# EAGLE board mic_sensor_arduino_panelized (EAGLE 9.6.2)
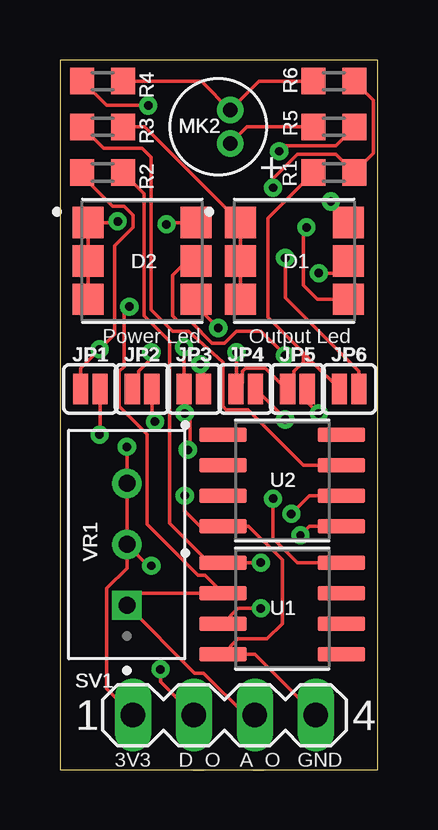
[diagram p0: board, top side]
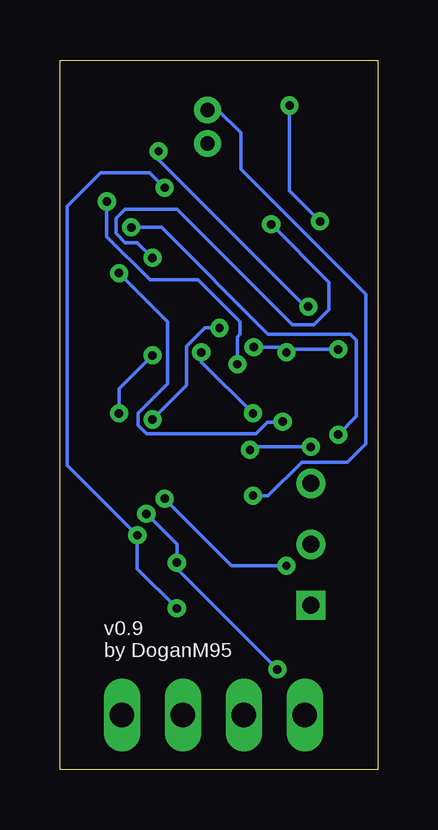
[diagram p1: board, bottom side, seen from below]

Size 13.26 x 29.58 mm. Coordinates in mm from the lower left corner, seen from the top.
Outline: 0,0 13.26,0 13.26,29.58 0,29.58 0,0
Copper layers (1*16): Top 0.035mm / dielectric 1.5mm / Bottom 0.035mm
Design rules "default *": minimum track width 6mil, minimum drill 0.35mm, track to track 6mil, track to pad 6mil, pad to pad 6mil, via to via 6mil, smd to smd 6mil, copper to edge 40mil, drill to drill 6mil, minimum pad ring 10mil, minimum via ring 8mil, stop-mask expansion 4mil, vias tented up to drill 20mil, thermal gap 10mil

## Footprints (pad centres in the part's own frame; a part is rotated, then mirrored left to right if it is on the bottom)
LED_LTST-G563ZEGBW = smd 1.3 x 1.3: 1 -2.25,1.6; 2 -2.25,0; 3 -2.25,-1.6; 4 2.25,-1.6; 5 2.25,0; 6 2.25,1.6
SMT-JUMPER_2_NO_SILK = smd 0.635 x 1.27: 1 -0.406,0; 2 0.406,0
MIC_CMC-4015-40P = drill 0.6: M 0.5,0.7; P 0.5,-0.7
R0603 = smd 1 x 1.1: 1 -0.85,0; 2 0.85,0
MA04-1 = drill 1.016 long: 1 -3.81,0; 2 -1.27,0; 3 1.27,0; 4 3.81,0
SOIC127P599X175-8N = smd 1.97 x 0.6: 1 -2.47,1.905; 2 -2.47,0.635; 3 -2.47,-0.635; 4 -2.47,-1.905; 5 2.47,-1.905; 6 2.47,-0.635; 7 2.47,0.635; 8 2.47,1.905
TRIM_3296W-1-103RLF = drill 0.71 square: 1 -2.54,0 | drill 0.71: 2 0,0; 3 2.54,0

## Placement (x,y rotation side)
D1  OUT_LTST-G563ZEGBW  [LED_LTST-G563ZEGBW]  9.78,21.21 0 top
D2  PWR_LTST-G563ZEGBW  [LED_LTST-G563ZEGBW]  3.43,21.21 0 top
JP1  RED  [SMT-JUMPER_2_NO_SILK]  1.27,15.88 0 top
JP2  GREEN  [SMT-JUMPER_2_NO_SILK]  3.43,15.88 0 top
JP3  BLUE  [SMT-JUMPER_2_NO_SILK]  5.59,15.88 0 top
JP4  RED  [SMT-JUMPER_2_NO_SILK]  7.75,15.88 0 top
JP5  Green  [SMT-JUMPER_2_NO_SILK]  9.91,15.88 0 top
JP6  Blue  [SMT-JUMPER_2_NO_SILK]  12.06,15.88 0 top
MK2  CMC-4015-40P  [MIC_CMC-4015-40P]  6.6,26.8 0 top
R1  100k  [R0603]  11.43,24.89 180 top
R2  10k  [R0603]  1.78,24.89 180 top
R3  10k  [R0603]  1.78,26.8 0 top
R4  1k  [R0603]  1.78,28.7 180 top
R5  150R  [R0603]  11.43,26.8 0 top
R6  100k  [R0603]  11.43,28.7 0 top
SV1  [MA04-1]  6.86,2.29 0 top
U1  LM393DR  [SOIC127P599X175-8N]  9.27,6.73 0 top
U2  LM393DR  [SOIC127P599X175-8N]  9.27,12.06 0 top
VR1  3296W-1-103RLF  [TRIM_3296W-1-103RLF]  2.79,9.4 90 top

## Library data of the parts
D1 D2 = LTST-G563ZEGBW; AVAILABILITY: Not in stock; CHECK_PRICES: https://www.snapeda.com/parts/LTST-G563ZEGBW/Lite-On/view-part/?ref=eda; DESCRIPTION: LED; SMD; 5050, PLCC6; RGB; 5x5x1.6mm; 120°; 20mA; Lens: transparent; MF: Lite-On; MP: LTST-G563ZEGBW; PACKAGE: PLCC-6 Lite-On; PRICE: None; SNAPEDA_LINK: https://www.snapeda.com/parts/LTST-G563ZEGBW/Lite-On/view-part/?ref=snap
JP1-JP6 = SparkFun-Jumpers
MK2 = CMC-4015-40P; AVAILABILITY: In Stock; CHECK_PRICES: https://www.snapeda.com/parts/CMC-4015-40P/CUI+Devices/view-part/?ref=eda; CUI_PURCHASE_URL: https://www.cuidevices.com/product/audio/microphones/electret-condenser-microphones/cmc-4015-40p?utm_source=snapeda.com&utm_medium=referral&utm_campaign=snapedaBOM; DESCRIPTION: 4.0 mm, Omnidirectional, PCB Mount, 2.0 Vdc, Electret Condenser Microphone; MF: CUI Devices; MP: CMC-4015-40P; PACKAGE: None; PRICE: None; PURCHASE-URL: https://www.snapeda.com/api/url_track_click_mouser/?unipart_id=1814008&manufacturer=CUI Devices&part_name=CMC-4015-40P&search_term=cmc-4015-40p; SNAPEDA_LINK: https://www.snapeda.com/parts/CMC-4015-40P/CUI+Devices/view-part/?ref=snap
R1-R6 = resistor
SV1 = con-lstb; OC_FARNELL: unknown; OC_NEWARK: unknown
U1 U2 = LM393DR; AVAILABILITY: In Stock; CHECK_PRICES: https://www.snapeda.com/parts/LM393DR/Texas+Instruments/view-part/?ref=eda; DESCRIPTION: Dual differential comparator, commercial grade; MF: Texas Instruments; MP: LM393DR; PACKAGE: SOIC-8 Texas Instruments; PRICE: None; PURCHASE-URL: https://www.snapeda.com/api/url_track_click_mouser/?unipart_id=6437&manufacturer=Texas Instruments&part_name=LM393DR&search_term=lm393dr; SNAPEDA_LINK: https://www.snapeda.com/parts/LM393DR/Texas+Instruments/view-part/?ref=snap
VR1 = 3296W-1-103RLF; AVAILABILITY: In Stock; CHECK_PRICES: https://www.snapeda.com/parts/3296W-1-103RLF/Bourns/view-part/?ref=eda; DESCRIPTION: Trimmer, Cermet, Rest 10 Kilohms, PCB, 25 Turns, Pwr-Rtg 0.5W | Bourns 3296W-1-103RLF; MF: Bourns; MP: 3296W-1-103RLF; PACKAGE: NON STANDARD-3 Bourns; PRICE: None; PURCHASE-URL: https://www.snapeda.com/api/url_track_click_mouser/?unipart_id=480309&manufacturer=Bourns&part_name=3296W-1-103RLF&search_term=None; SNAPEDA_LINK: https://www.snapeda.com/parts/3296W-1-103RLF/Bourns/view-part/?ref=snap

## Nets
2IN+: R1.1 R6.2 U1.3 U2.5
2OUT: R3.1 U2.7
3V3: JP1.1 JP2.1 JP3.1 JP4.1 JP5.1 JP6.1 R1.2 R2.2 SV1.1 U1.8 VR1.2 VR1.3
A_OUT: R5.2 SV1.3 U1.2 VR1.1
D_OUT: R2.1 SV1.2 U1.1 U2.6
GND: MK2.M R4.1 R6.1 SV1.4 U1.4 U2.4
N$1: D1.4 JP1.2
N$2: D1.5 JP2.2
N$5: D1.6 JP3.2
N$6: D2.4 JP4.2
N$7: D2.5 JP5.2
N$8: D2.6 JP6.2
O_L_GND: D1.1 D1.2 D1.3 R3.2
OUT: MK2.P R5.1
P_L_GND: D2.1 D2.2 D2.3 R4.2
VCC: U2.8

## Tracks (layer width: path | path; a pad name or v marks a point on that pad's centre or on a via)
2IN+  (via drill 0.35)
  Top 0.152: U1.3 7.44,6.73 v8.38,6.73 | v10.03,9.78 10.41,10.16 U2.5 | R6.2 13.08,27.9 13.08,25.69 R1.1 11.52,25.65 9.91,25.65 8.89,24.64 v8.89,24.26
  Bottom 0.152: v8.38,6.73 10.03,8.38 v10.03,9.78 12.95,12.7 12.95,23.5 11.56,24.89 9.53,24.89 v8.89,24.26
2OUT
  Top 0.152: R3.1 1.82,25.91 3.43,25.91 3.81,25.53 3.81,19.18 4.7,18.29 5.37,18.29 6.79,16.99 6.79,15.14 6.93,15.01 7.85,15.01 10.16,12.7 U2.7
3V3  (via drill 0.35)
  Top 0.152: VR1.2 VR1.3 v2.79,13.46 | VR1.2 2.79,8.4 1.96,7.56 1.96,3.38 SV1.1 | R1.2 8.68,22.99 8.68,18.86 10.08,17.45 10.16,17.37 | 10.16,17.37 10.58,16.95 | 10.58,16.95 JP6.1 | 10.58,16.95 10.16,16.95 | 10.16,16.95 10.12,16.95 9.77,16.61 9.77,16.14 JP5.1 9.43,15.88 8.57,16.74 7.74,16.74 7.61,16.61 7.61,16.14 JP4.1 7.37,15.9 v7.37,17.4 | JP1.1 0.86,16.74 v1.65,17.53 2.29,18.16 2.29,21.84 3.05,22.61 3.05,23.11 2.67,23.5 2.2,23.5 0.93,24.77 R2.2 | JP2.1 3.29,16.14 3.29,16.61 3.81,17.12 v3.81,17.4 | v5.18,17.62 5.21,17.64 5.21,17.65 v5.18,17.63 JP3.1 5.18,14.88 v5.21,14.86 5.44,14.63 5.44,13.44 v5.33,13.34 | U1.8 9.91,8.64 8.89,9.65 v8.89,11.3 | v3.81,8.51 3.68,8.51 VR1.2 | 10.16,16.95 10.16,17.37
  Bottom 0.152: v1.65,17.53 3.68,17.53 v3.81,17.4 4.03,17.62 v5.18,17.62 | v5.21,14.86 7.37,17.02 v7.37,17.4 | v8.89,11.3 6.1,8.51 v3.81,8.51 | v2.79,13.46 5.21,13.46 v5.33,13.34
A_OUT  (via drill 0.35)
  Top 0.152: SV1.3 7.75,2.29 6,4.04 5.61,4.04 VR1.1 3.3,7.37 U1.2 6.06,8.11 5.76,8.11 3.63,10.24 3.63,13.99 2.48,15.14 2.48,16.61 2.67,16.8 2.67,19.07 v2.9,19.3 | v9.14,25.78 9.38,26.02 11.5,26.02 R5.2
  Bottom 0.152: v2.9,19.3 3.02,19.3 9.14,25.42 v9.14,25.78
D_OUT  (via drill 0.35)
  Top 0.152: R2.1 3.5,24.02 3.5,18.92 4.57,17.86 4.57,10.29 6.22,8.64 U1.1 v8.38,8.64 | SV1.2 4.19,3.68 v4.19,4.19 | U2.6 10.41,11.43 v9.65,10.67
  Bottom 0.152: v4.19,4.19 8.38,8.38 v8.38,8.64 8.38,9.4 v9.65,10.67
GND  (via drill 0.35)
  Top 0.152: R4.1 5.9,28.7 MK2.M 8.31,28.7 R6.1 | SV1.4 8.13,4.83 U1.4 7.44,5.46 8.64,5.46 9.27,6.1 9.27,8.76 7.87,10.16 U2.4 5.84,10.16 5.21,10.79 v5.21,11.43
  Bottom 0.152: v5.21,11.43 4.57,11.43 3.17,12.83 1.27,12.83 0.51,13.59 0.51,19.81 5.71,25.02 5.71,26.54 6.67,27.5 MK2.M
N$1  (via drill 0.35)
  Top 0.152: JP1.2 1.68,13.99 v1.65,13.97 | v10.29,22.61 10.16,22.48 10.16,20.19 10.74,19.61 D1.4
  Bottom 0.152: v1.65,13.97 0.89,14.73 0.89,17.91 1.14,18.16 4.57,18.16 9.02,22.61 v10.29,22.61
N$2  (via drill 0.35)
  Top 0.152: D1.5 11.52,20.7 v10.79,20.7 | v3.96,14.52 3.83,14.64 JP2.2
  Bottom 0.152: v10.79,20.7 8.76,18.67 8.76,16.1 10.01,14.86 10.01,14.35 9.65,14 5.08,14 4.6,14.48 3.94,14.48 3.94,14.49 v3.96,14.52
N$5  (via drill 0.35)
  Top 0.152: JP3.2 5.99,16.74 5.84,16.89 v5.86,16.9 | D1.6 11.3,23.54 v11.3,23.69
  Bottom 0.152: v5.86,16.9 5.86,18.05 5.74,18.16 5.74,18.67 7.5,20.42 9.5,20.42 11.3,22.23 v11.3,23.69
N$6  (via drill 0.35)
  Top 0.152: JP4.2 9.4,14.63 v9.4,14.61 | v6.6,18.41 5.68,19.34 D2.4
  Bottom 0.152: v9.4,14.61 7.97,16.03 7.97,17.65 7.21,18.41 v6.6,18.41
N$7  (via drill 0.35)
  Top 0.152: D2.5 5.3,21.21 4.7,20.61 4.7,18.92 4.95,18.67 5.46,18.67 6.35,17.78 6.86,17.78 7.37,18.29 8.38,18.29 v9.4,17.27 | v10.79,14.86 10.31,15.34 JP5.2
  Bottom 0.152: v9.4,17.27 10.79,15.88 v10.79,14.86
N$8  (via drill 0.35)
  Top 0.152: JP6.2 12.47,16.61 9.4,19.68 v9.4,21.34 | v4.45,22.73 4.52,22.81 D2.6
  Bottom 0.152: v9.4,21.34 10.03,21.97 10.54,21.97 10.92,22.35 10.92,22.99 10.54,23.37 8.38,23.37 3.56,18.54 2.67,18.54 2.03,19.18 2.03,20.32 v4.45,22.73
O_L_GND
  Top 0.152: R3.2 3.54,26.8 D1.1 D1.2 D1.3
OUT
  Top 0.152: R5.1 7.8,26.8 MK2.P
P_L_GND  (via drill 0.35)
  Top 0.152: R4.2 1.94,27.69 v3.68,27.69 | v2.41,22.86 2.36,22.81 D2.1 D2.2 D2.3
  Bottom 0.152: v3.68,27.69 3.68,24.13 v2.41,22.86

## Text on the board
tNames: Power Led | Output Led | 3V3 | D_O | A_O | GND
bNames: v0.9 / by DoganM95
_tNames: R4 | R4 | R4 | R6 | R6 | R6 | R3 | R3 | R3 | MK2 | MK2 | MK2 | R5 | R5 | R5 | R2 | R2 | R2 | R1 | R1 | R1 | D2 | D2 | D2 | D1 | D1 | D1 | JP1 | JP1 | JP1 | JP2 | JP2 | JP2 | JP3 | JP3 | JP3 | JP4 | JP4 | JP4 | JP5 | JP5 | JP5 | JP6 | JP6 | JP6 | U2 | U2 | U2 | VR1 | VR1 | VR1 | U1 | U1 | U1 | SV1 | SV1 | SV1